# Altium PCB EMG.PcbDoc
Units mm, origin at the board's own origin, x right, y up, seen from the top; angles counter-clockwise.
Board outline 13.55 x 33.34 mm, 4 copper layers (Component Side, Ground Plane, Power Plane, Bottom Layer), stack 0.778 mm thick; 25 components, 21 nets, 71 pads, 13 vias.
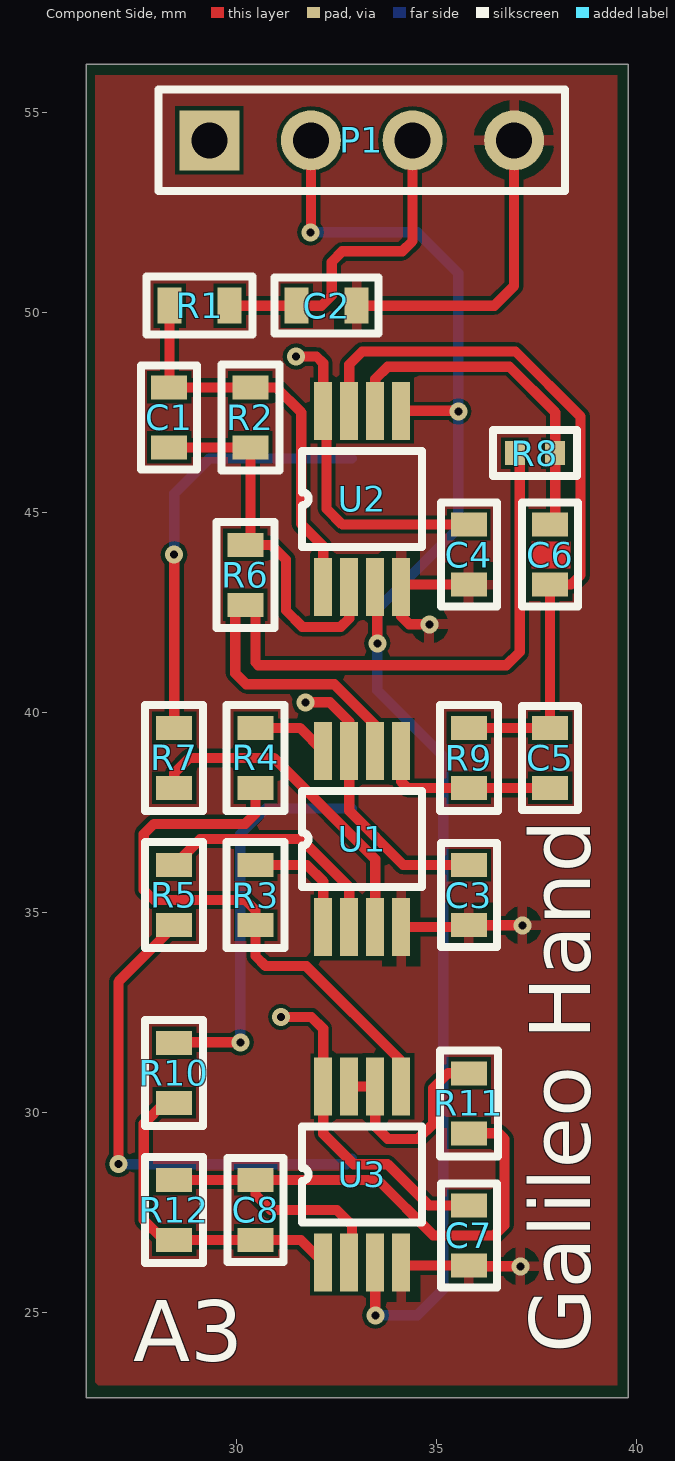
[diagram p0: Component Side view]
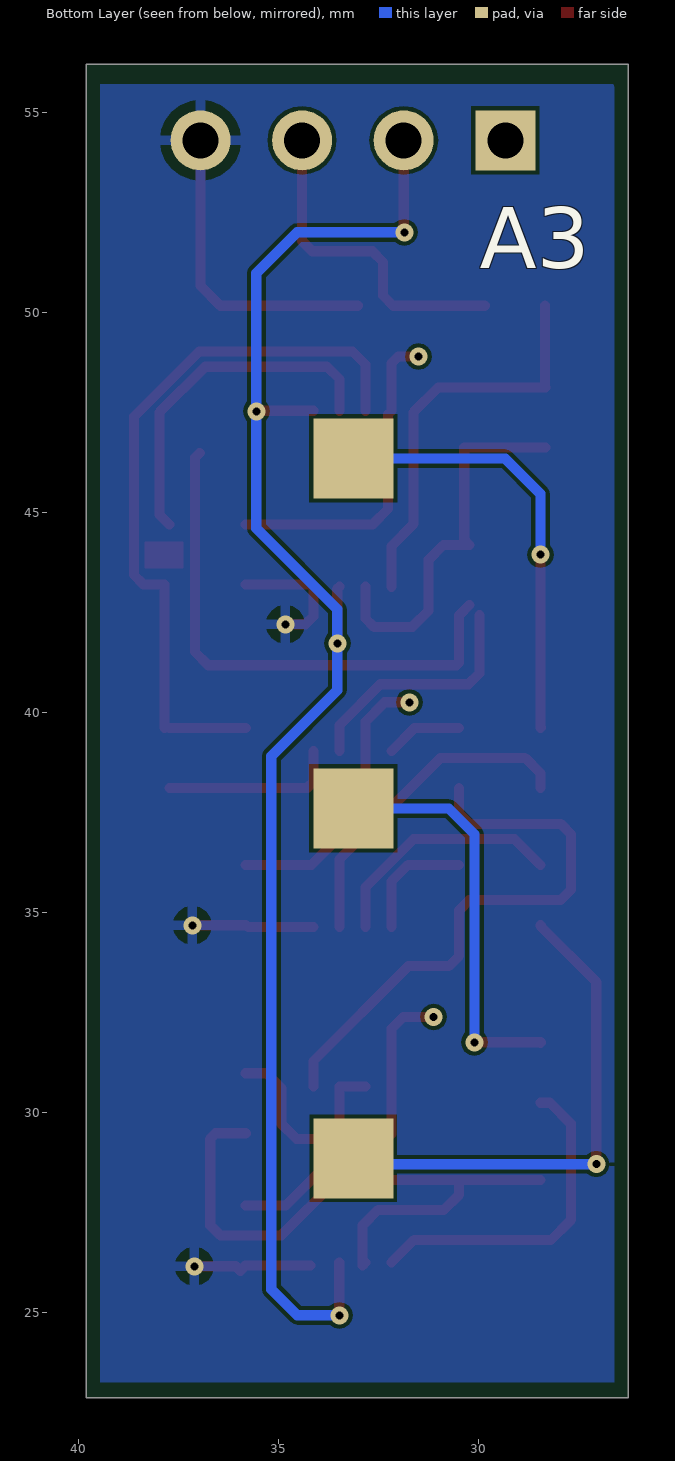
[diagram p1: Bottom Layer view, seen from below]
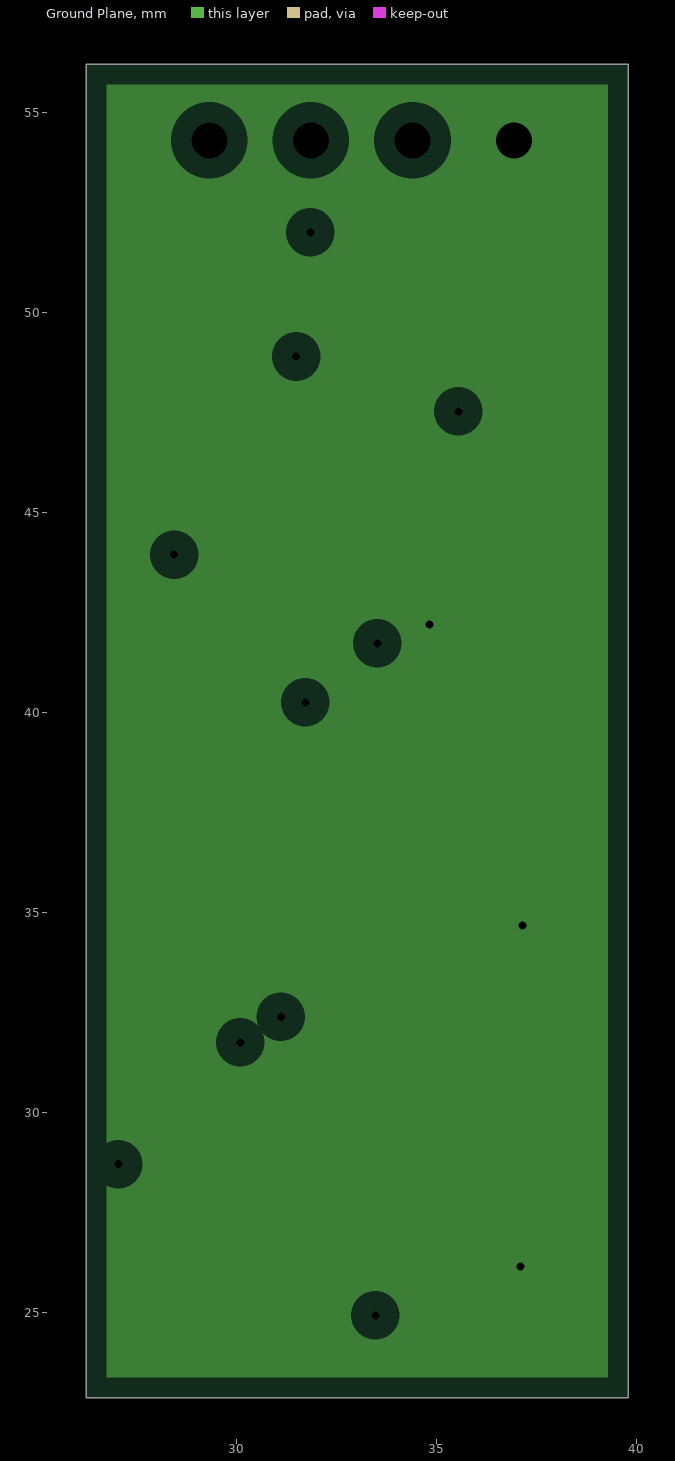
[diagram p2: Ground Plane, clearances drawn from the general rule]
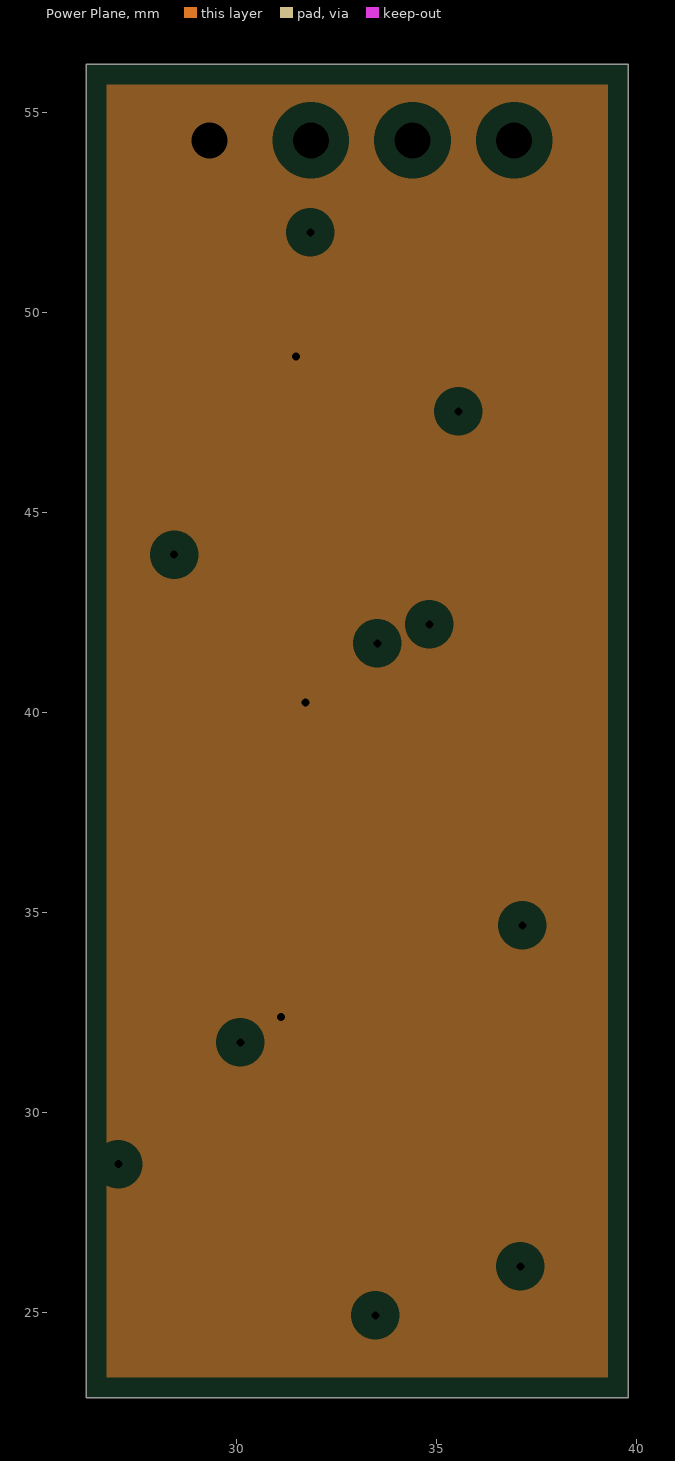
[diagram p3: Power Plane, clearances drawn from the general rule]

## Layer stack, top to bottom
Top Solder: solder mask 0.0102, Solder Resist, Dk 3.5
Component Side: signal copper 0.0356
Dielectric 1: core 0.254, FR-4, Dk 4.2
Ground Plane: plane copper 0.036
Dielectric 3: prepreg 0.127, Dk 4.2
Power Plane: plane copper 0.036
Dielectric 2: core 0.254, Dk 4.2
Bottom Layer: signal copper 0.0356
Solder Side: solder mask 0.0102, Solder Resist, Dk 3.5

## Board outline
26.25,22.86 39.8,22.86 39.8,56.2 26.25,56.2

## Design rules (kind name [scope] priority, off if disabled: settings)
Clearance [All] p1: gap=0.1
HoleToHoleClearance [All] p1: gap=0.1 allowstackedmicrovias=TRUE
MinimumSolderMaskSliver [All] p1: minsoldermaskwidth=0.1
NetAntennae [All] p1: netantennaetolerance=0.5
PlaneClearance [All] p1: clearance=0.508
PlaneConnect [All] p1: planeconnectstyle=Relief reliefexpansion=0.508 reliefentries=4 reliefconductorwidth=0.254 reliefairgap=0.254
PolygonConnect [All] p1: connectstyle=Relief reliefconductorwidth=0.254 reliefentries=4 polygonreliefangle="90 Angle" airgapwidth=0.254
RoutingLayers [All] p1: top layer_v5=FALSE bottom layer_v5=TRUE
RoutingVias [All] p1: holewidth=0.711 width=1.27 viastyle="Through Hole" minholewidth=0.711 minwidth=1.27 maxholewidth=0.711 maxwidth=1.27
SilkToSilkClearance [All] p1: silktosilkclearance=0.1
SilkToSolderMaskClearance [IsPad] p1: minsilkscreentomaskgap=0.1 clearancetoexposedcopper=TRUE
SolderMaskExpansion [All] p1: expansion=0.102
Width [All] p1: maxlimit=0.75 minlimit=0.254 preferedwidth=0.254
22 further rules are at their usual default settings.

## Components (designator, comment, footprint, x,y, rotation, side; value= is the part's Value field where it differs from the comment)
A3 "EPADS" PADS 33.125,37.6 r90 bottom (schematic designator *)
C1 "100pF" C0603 28.321,47.371 r90 top
C2 "100nF" C0603 32.258,50.165 r0 top
C3 "100nF" C0603 35.814,35.433 r90 top
C4 "100nF" C0603 35.814,43.942 r90 top
C5 "750pF" C0603 37.846,38.862 r270 top
C6 "1uF" C0603 37.846,43.942 r90 top
C7 "100nF" C0603 35.814,26.924 r90 top
C8 "1uF" C0603 30.48,27.559 r90 top
P1 "Header 4" HDR1X4 29.325,54.3 r0 top
R1 "100" R0603 29.083,50.165 r0 top
R2 "1M" R0603 30.353,47.371 r90 top
R3 "20k" R0603 30.48,35.433 r270 top
R4 "20k" R0603 30.48,38.862 r90 top
R5 "100k" R0603 28.448,35.433 r90 top
R6 "10k" R0603 30.226,43.434 r90 top
R7 "100k" R0603 28.448,38.862 r270 top
R8 "3.3M" R0402 37.465,46.482 r180 top
R9 "200k" R0603 35.814,38.862 r270 top
R10 "100k" R0603 28.448,30.988 r270 top
R11 "20k" R0603 35.814,30.226 r90 top
R12 "100k" R0603 28.448,27.559 r90 top
U1 "INA326EA/2K5" VSOP8 33.147,36.83 r90 top
U2 "OPA2335AIDGKR" VSOP8 33.147,45.339 r90 top
U3 "OPA2335AIDGKR" VSOP8 33.147,28.448 r90 top

## Footprints (in the part's own frame and the unit in brackets; to place one, negate y for a bottom-side part, rotate by r counter-clockwise, add the part's x,y. Pads: shape width x height; smd on the part's side, far side on the other; paste and mask are expansions set on the pad)
C0603 [mm]
  rect 0.6x0.9 smd: 1(-0.75,0) 2(0.75,0)
  silkscreen extent -1.3,-0.7 1.3,0.7
HDR1X4 [mm] "Connector; Header; 4 Position"
  rect 1.5x1.5 hole 0.9: 1(0,0)
  round 1.5 hole 0.9: 2(2.54,0) 3(5.08,0) 4(7.62,0)
  silkscreen extent -1.27,-1.27 8.89,1.27
PADS [mm]
  rect 2x2 smd: 1(-8.75,0) 2(8.75,0) 3(0,0)
R0402 [mm]
  rect 0.5x0.6 smd: 1(-0.5,0) 2(0.5,0)
  silkscreen extent -1.05,-0.58 1.05,0.58
R0603 [mm]
  rect 0.6x0.9 smd: 1(-0.75,0) 2(0.75,0)
  silkscreen extent -1.33,-0.72 1.33,0.72
VSOP8 [mm]
  rect 1.45x0.45 smd mask+0.05: 1(-2.2,0.975) 2(-2.2,0.325) 3(-2.2,-0.325) 4(-2.2,-0.975) 5(2.2,-0.975) 6(2.2,-0.325) 7(2.2,0.325) 8(2.2,0.975)
  silkscreen extent -1.2,-1.5 1.2,1.5

## Part data
A3: library part PADS
C1: library part 06033C101KAT2A, "CAP CER 100PF 25V X7R 0603"
C2 C3 C4 C7: library part GRM188R71E104KA01D, "CAP CER 0.1UF 25V X7R 0603"
C5: library part GRM1885C1H751JA01D, "CAP CER 750PF 50V NP0 0603"
C6 C8: library part GRM188R61E105KA12D, "CAP CER 1UF 25V X5R 0603"
P1: "Header, 4-Pin"
R1: library part ERJ-3EKF1000V, "RES SMD 100 OHM 1% 1/10W 0603"
R2: library part MCT06030C1004FP500, "RES SMD 1M OHM 1% 1/8W 0603"
R3 R4 R11: library part ERJ-3EKF2002V, "RES SMD 20K OHM 1% 1/10W 0603"
R5 R7 R10 R12: library part MCT06030C1003FP500, "RES SMD 100K OHM 1% 1/8W 0603"
R6: library part MCT06030C1002FP500, "RES SMD 10K OHM 1% 1/8W 0603"
R8: library part MCR01MRTJ335, "RES SMD 3.3M OHM 5% 1/16W 0402"
R9: library part MCT06030C2003FP500, "RES SMD 200K OHM 1% 1/8W 0603"
U1: "IC OPAMP INSTR 1KHZ RRO 8VSSOP"
U2 U3: "IC OPAMP CHOPPER 2MHZ RRO 8VSSOP"

## Via types
v1: diameter 0.45, hole 0.2, Component Side to Bottom Layer, 13 vias

## Nets (pads, with @x,y where several pads share a name; then routed paths per layer and width w, separated by ;. In a path a pad name is that pad's centre, name@x,y a point inside that pad or via, vN(x,y) a via of type N, cw(c..) or ccw(c..) an arc to the next point about the centre after c; other vN are vias at no path point)
+1V25: P1.2 U2.3 U2.5 U3.3 | length 39.5
  Component Side w0.254: v1(31.85,52) 31.865,52.015 P1.2 ; U3.3 33.475,26.245 v1(33.475,24.925) ; U2.3 33.525,43.086 v1(33.525,41.725) ; U2.5 v1@35.55,47.539
  Bottom Layer w0.254: v1(31.85,52) 34.525,52 35.55,50.975 v1(35.55,47.525) 35.55,44.6 33.525,42.575 v1(33.525,41.725) 33.525,40.55 35.175,38.9 35.175,25.575 34.525,24.925 v1(33.475,24.925)
+5V: C3.2 C4.2 C7.2 P1.1 U1.7 U2.8 U3.8 | length 23.3
  Component Side w0.254: v1(31.115,32.385) 31.877,32.385 32.172,32.09 U3.8 32.172,29.464 32.934,28.702 33.782,28.702 34.81,27.674 C7.2 ; v1(31.496,48.895) 32.004,48.895 32.172,48.727 U2.8 ; v1(31.725,40.25) 32.338,40.25 32.822,39.766 U1.7 32.822,37.536 34.175,36.183 C3.2 ; U2.8@32.258,47.453 32.258,45.085 32.651,44.692 C4.2
GND: C2.2 C3.1 C4.1 C7.1 P1.4 U1.4 U2.4 U3.4 | length 16.9
  Component Side w0.254: C2.2 36.449,50.165 36.945,50.661 P1.4 ; U1.4 C3.1@35.761,34.63 ; U2.4 34.122,42.403 34.325,42.2 v1(34.825,42.2) ; U2.4@34.175,43.192 C4.1 ; U3.4@34.196,26.174 C7.1 35.95,26.038 36.062,26.15 v1(37.1,26.15) ; C3.1 35.822,34.675 v1(37.15,34.675)
Net*_1: A3.1 R5.1 | length 12.5
  Component Side w0.254: v1(27.051,28.702) 27.051,33.262 28.448,34.659 28.436,34.671 R5.1
  Bottom Layer w0.254: v1(27.051,28.702) 32.753,28.702 A3.1@32.893,28.842
Net*_2: A3.2 R7.1 | length 10.7
  Component Side w0.254: R7.1@28.436,39.624 R7.1 v1(28.448,43.942)
  Bottom Layer w0.254: v1(28.448,43.942) 28.448,45.466 29.324,46.342 A3.2@32.893,46.342
Net*_3: A3.3 R10.1 | length 9.9
  Component Side w0.254: R10.1 28.436,31.75 v1(30.099,31.75)
  Bottom Layer w0.254: v1(30.099,31.75) 30.099,36.957 30.734,37.592 A3.3@32.893,37.592
NetC1_1: C1.1 R2.1 R6.2 U2.2 | length 9.6
  Component Side w0.254: C1.1 R2.1 30.353,44.311 R6.2 30.873,44.184 31.242,43.815 31.242,42.545 31.65,42.137 32.612,42.137 32.822,42.347 U2.2
NetC1_2: C1.2 R1.1 R2.2 U2.1 | length 10.2
  Component Side w0.254: C1.2 R2.2 31,48.121 31.623,47.498 31.623,44.704 32.172,44.155 U2.1 ; C1.2@28.333,48.133 R1.1
NetC5_1: C5.1 C6.1 R9.1 U2.7 | length 18.1
  Component Side w0.254: U2.7 32.822,48.697 33.147,49.022 36.978,49.022 38.608,47.392 38.608,43.434 38.366,43.192 C6.1 C5.1 ; R9.1 C5.1@37.719,39.612
NetC5_2: C5.2 R9.2 U1.5 | length 4.4
  Component Side w0.254: U1.5 34.122,38.268 34.278,38.112 R9.2 C5.2@37.719,38.112
NetC6_2: C6.2 R8.1 U2.6 | length 8.8
  Component Side w0.254: U2.6 33.472,48.331 33.782,48.641 36.83,48.641 37.973,47.498 37.973,44.946 C6.2@37.719,44.692
NetC8_1: C8.1 R10.2 R12.1 U3.1 | length 8.3
  Component Side w0.254: R10.2 28.206,30.238 27.686,29.718 27.686,27.305 28.182,26.809 R12.1 C8.1 31.611,26.809 U3.1
NetC8_2: C8.2 R11.1 R12.2 U3.2 | length 16.2
  Component Side w0.254: R12.2 C8.2 ; U3.2 32.893,26.177 32.893,27.178 32.512,27.559 30.861,27.559 30.48,27.94 C8.2 ; R11.1 36.564,29.476 36.703,29.337 36.703,27.178 36.449,26.924 34.925,26.924 33.54,28.309 C8.2
NetR3_1: R3.1 U1.1 | length 3
  Component Side w0.254: R3.1 31.762,36.183 32.172,35.773 U1.1
NetR4_2: R4.2 U1.8 | length 1.9
  Component Side w0.254: R4.2 31.59,39.612 U1.8
NetR5_2: R5.2 U1.2 | length 6.1
  Component Side w0.254: R5.2 29.095,36.83 31.62,36.83 32.822,35.628 U1.2
NetR6_1: R6.1 R8.2 U1.6 | length 19.5
  Component Side w0.254: R6.1@29.972,42.43 29.972,40.978 30.248,40.702 32.45,40.702 33.472,39.68 U1.6 ; R6.1 30.48,42.43 30.48,41.245 30.55,41.175 36.75,41.175 37.084,41.509 37.084,46.363 R8.2
NetR7_2: R7.2 U1.3 | length 8.3
  Component Side w0.254: R7.2 28.448,38.481 28.829,38.862 30.938,38.862 33.472,36.328 U1.3
NODO1: R3.2 R4.1 U3.5 | length 14.6
  Component Side w0.254: R4.1 30.48,37.465 30.226,37.211 27.94,37.211 27.686,36.957 27.686,35.56 27.94,35.306 30.226,35.306 30.48,35.052 R3.2 30.48,33.909 30.734,33.655 31.75,33.655 34.122,31.283 U3.5
NODO2: R11.2 U3.6 U3.7 | length 5.3
  Component Side w0.254: U3.7 U3.6 33.472,29.647 33.782,29.337 34.544,29.337 34.925,29.718 34.925,30.607 35.294,30.976 R11.2
OUT: C2.1 P1.3 R1.2 | length 8.3
  Component Side w0.254: R1.2 C2.1 32.131,50.165 32.385,50.419 32.385,51.26 32.65,51.525 34.15,51.525 34.405,51.78 P1.3

## Polygon pours and split planes (outlines as drawn)
GND on Component Side "GND" (solid, pour order 8): 26.475,55.925 39.525,55.925 39.525,23.175 26.55,23.175 26.475,23.25 26.475,55.925 27.85,55.925
GND on Component Side "GND" (solid, pour order 6): 39.525,53.794 39.525,55.016 38.377,55.016 37.923,54.562 37.923,54.038 38.362,54.038 38.775,53.625 38.825,53.575 39.275,53.575 39.275,53.613 39.525,53.863 39.525,54.3
GND on Bottom Layer "GND" (solid, pour order 3): 26.6,55.7 39.45,55.7 39.45,23.25 26.6,23.25 26.6,55.625 26.525,55.7 27.725,55.7
GND on Multi-Layer "GND" (solid): 26.475,56 39.625,56 39.625,22.95 26.6,22.95 26.3,23.25 26.475,23.425 26.475,56 27.5,56
GND on Ground Plane (split plane): 39.29,23.37 26.76,23.37 26.76,55.69 39.29,55.69
+5V on Power Plane (split plane): 39.29,23.37 26.76,23.37 26.76,55.69 39.29,55.69

## Other copper
Component Side:
  rectangle: 37.375,43.6 38.35,44.275

## Silkscreen, mask and mechanical layers (free items; w line width, h text height)
Top Overlay:
  text "Galileo Hand" at 38.85,23.975 h1.52 r90
  text "A3" at 27.425,23.775 h1.52
Board Outline:
  the board outline again, w0.254